# Altium PCB Main.PcbDoc (part 3 of 3)
Units mm, origin at the board's own origin, x right, y up, seen from the top; angles counter-clockwise.
Board outline 100 x 100 mm, 4 copper layers (Top Layer, Layer 2, Layer 3, Bottom Layer), stack 1.606 mm thick; 196 components, 147 nets, 684 pads, 739 vias.
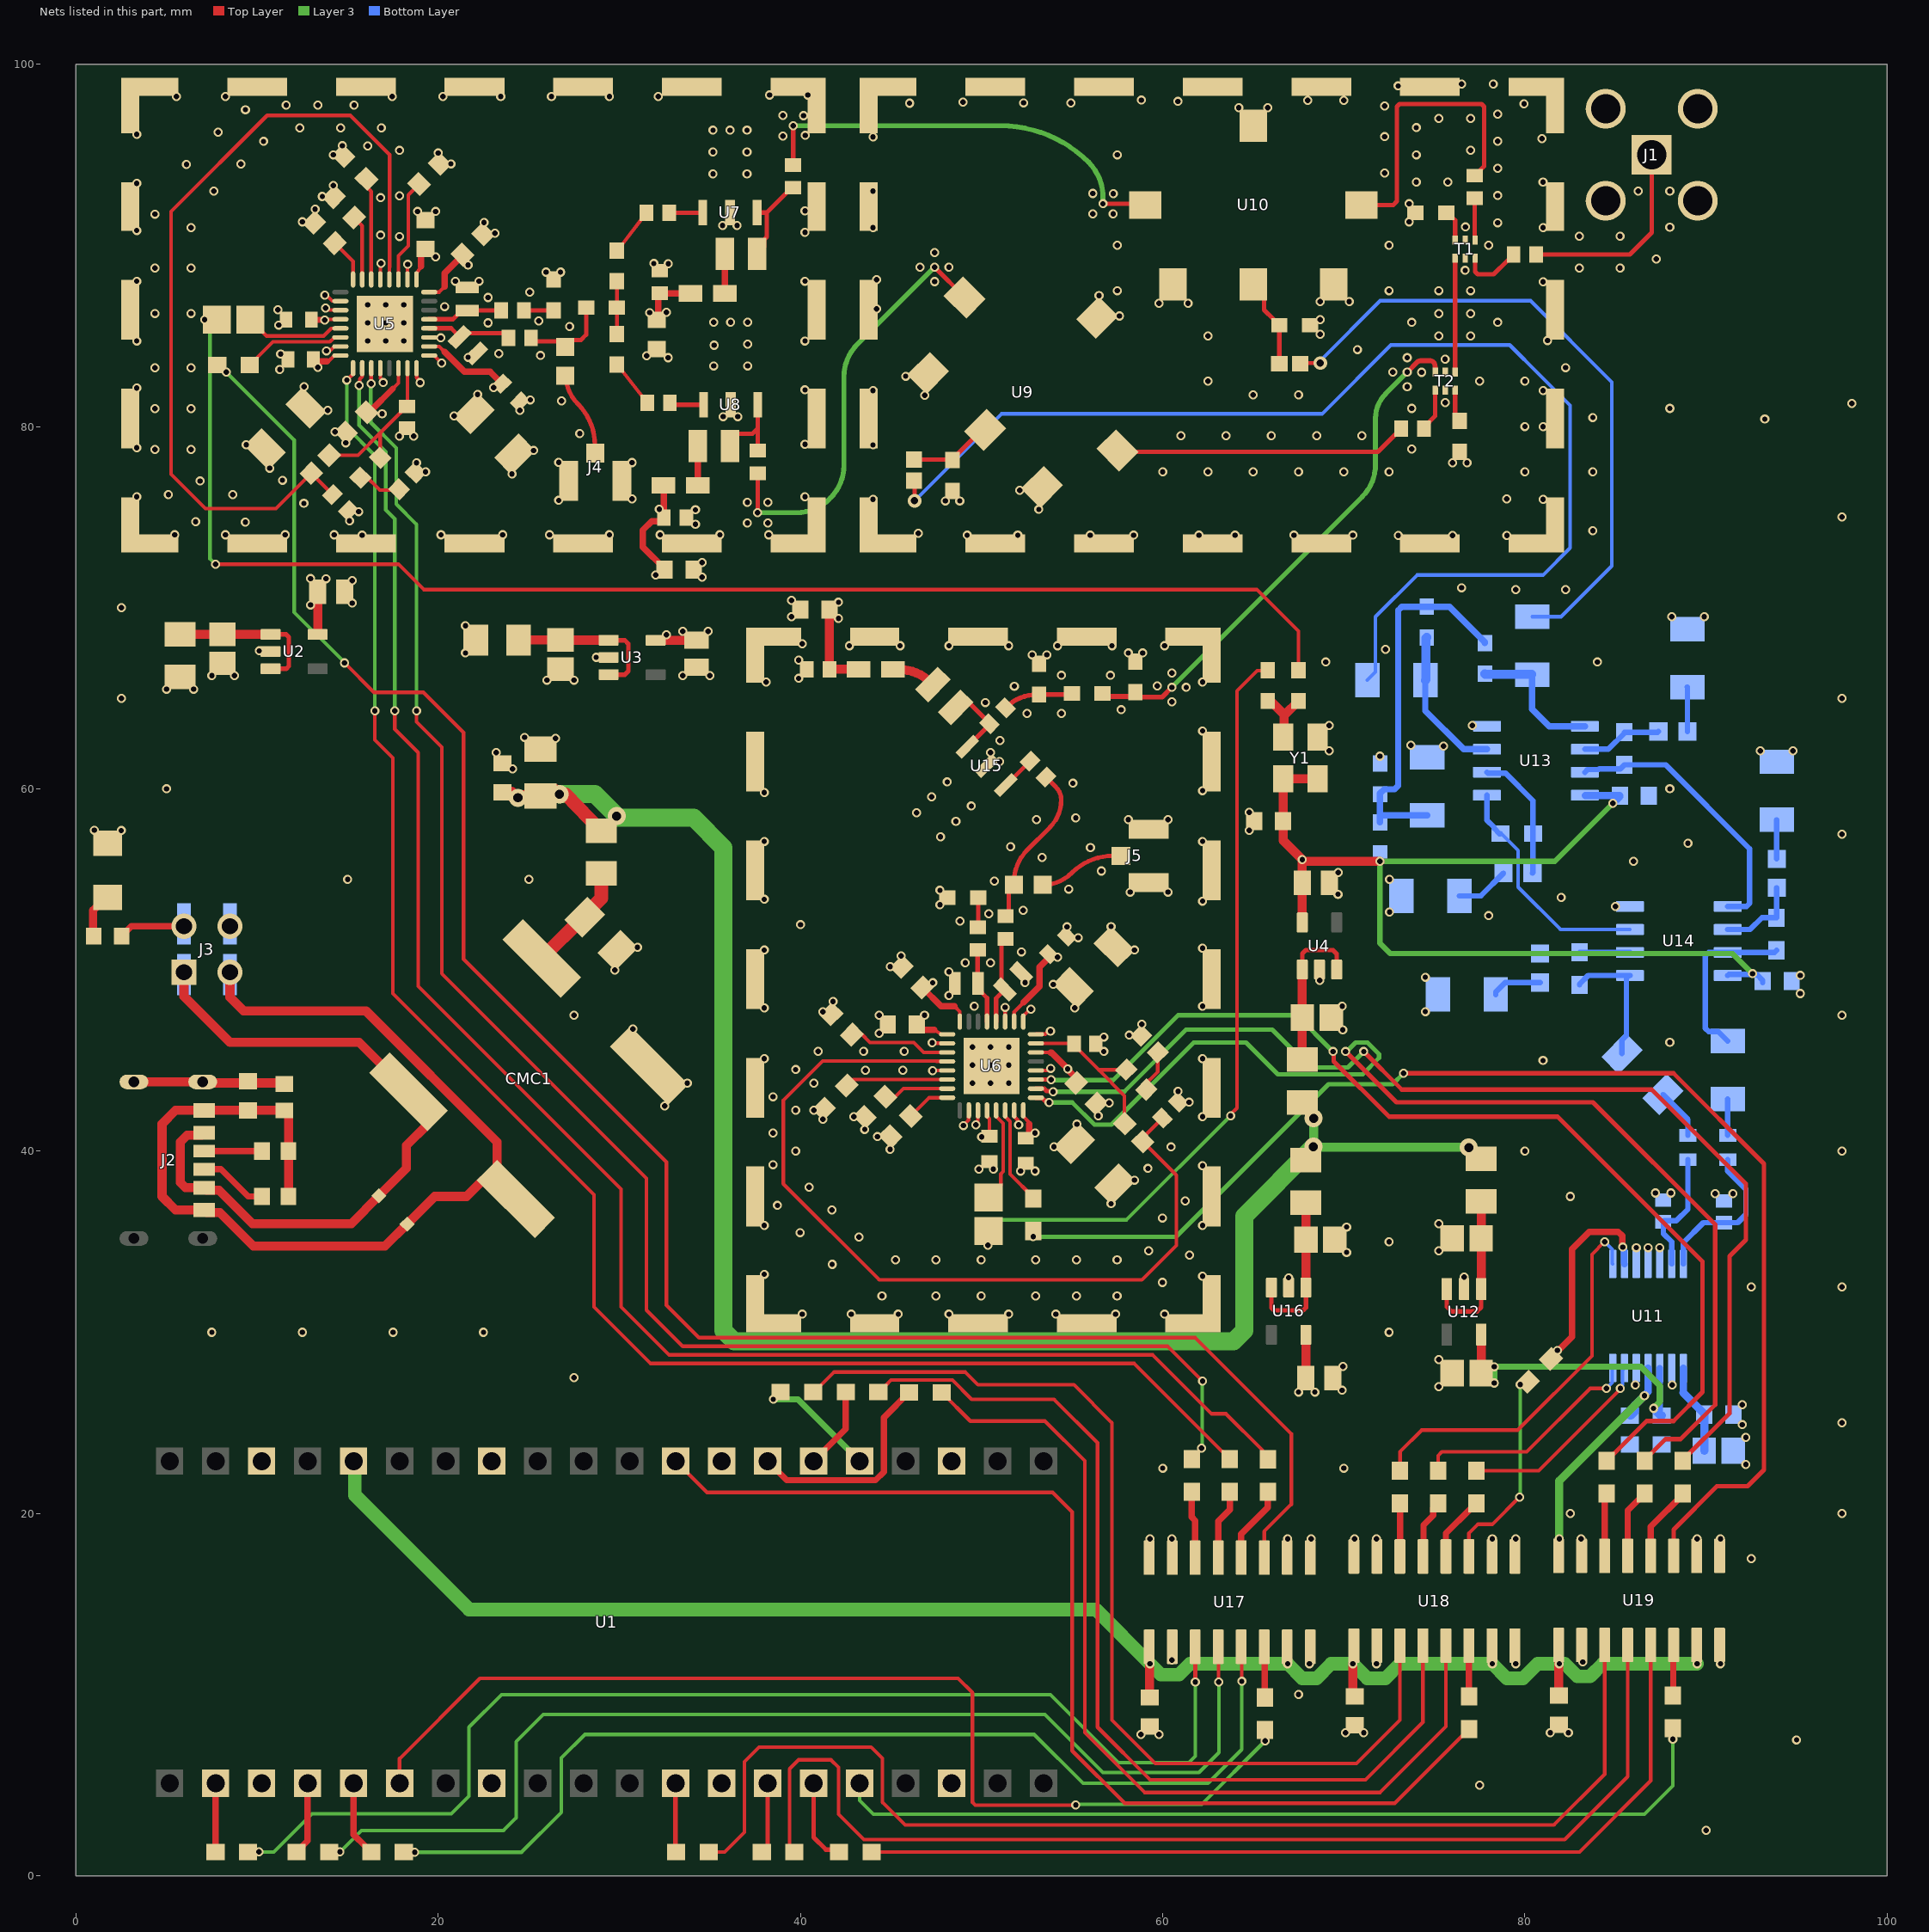
[diagram p4: the nets of this part, all layers, seen from the top]

## Part data (continued)
U13 U14: library part CMP-0272-00746-4, "IC OPAMP GP 2 CIRCUIT 8SOIC", Case/Package=D, Input Bias Current=10pA, Input Offset Voltage (Vos)=200uV, Max Operating Temperature=125°C, Max Supply Voltage=5.5V, Min Operating Temperature=-40°C, Min Supply Voltage=2.2V, Nominal Supply Current=5mA, Operating Supply Current=4.6mA, Output Current=65mA, Package Quantity=1, Power Supply Rejection Ratio (PSRR)=100dB, Voltage Gain=120dB, Bandwidth=50MHz, Common Mode Rejection Ratio=100dB, Contact Plating=Gold, Gain Bandwidth Product=50MHz, Lead Free="Lead Free", Max I/O Voltage=200uV, Number of Amplifiers=2, Number of Channels=2, Number of Circuits=2, Number of Elements=2, Number of Pins=8, Output Current per Channel=65mA, Packaging="Tape and Reel", Radiation Hardening=No, REACH SVHC="No SVHC", Slew Rate=25V/µs, Unity Gain Bandwidth Product=50MHz
U17 U18 U19: library part CMP-060-000000-1, "General Purpose Digital Isolator 2500Vrms 4 Channel 150Mbps 35kV/Âµs CMTI 16-SOIC (0.154, 3.90mm Width)", Package="SOIC-16 Silicon Labs", Check_prices=https://www.snapeda.com/parts/SI8641BB-B-IS1/Silicon+Labs/view-part/?ref=eda, Component Type=Standard, Design Item ID=SI8641BB-B-IS1, MF="Silicon Labs", MP=SI8641BB-B-IS1, Pin Count=16, SnapEDA_Link=https://www.snapeda.com/parts/SI8641BB-B-IS1/Silicon+Labs/view-part/?ref=snap, Source=SI8641BB-B-IS1.SchLib
Y1: library part CMP-041-000000-1, "TCXO Oscillators 32.000 MHZ Multi-Volt +1.7 3.6V HCMOS TCXO +/-2.5 ppm -30 +85 C 3.2x 2.5mm RoHS", Package="ECS-TXO-3225MV-0-4 ECS", Check_prices=https://www.snapeda.com/parts/ECS-TXO-3225MV-320-TR/ECS/view-part/?ref=eda, Component Type=Standard, Design Item ID=ECS-TXO-3225MV-320-TR, MF=ECS, MP=ECS-TXO-3225MV-320-TR, Pin Count=4, SnapEDA_Link=https://www.snapeda.com/parts/ECS-TXO-3225MV-320-TR/ECS/view-part/?ref=snap, Source=ECS-TXO-3225MV-320-TR.SchLib

## Free pads (board coordinates)
  rect 3.3x1 smd: 1(34.002,73.542) 1(74.756,73.542) 2(28.002,73.542) 2(68.756,73.542) 3(22.002,73.542) 3(62.756,73.542) 4(16.002,73.542) 4(56.756,73.542) 5(10.002,73.542) 5(50.756,73.542) 8(55.8,30.5) 9(49.8,30.5) 13(10.002,98.742) 13(50.756,98.742) 14(16.002,98.742) 14(56.756,98.742) 15(22.002,98.742) 15(62.756,98.742) 16(28.002,98.742) 16(68.756,98.742) 17(34.002,98.742) 17(74.756,98.742) 21(49.8,68.4) 22(55.8,68.4)
  rect 1x3.3 smd: 1(62.7,61.5) 2(62.7,55.5) 3(62.7,49.5) 4(62.7,43.5) 5(62.7,37.5) 8(3.002,80.442) 8(43.756,80.442) 9(3.002,86.442) 9(43.756,86.442) 13(37.5,37.5) 14(37.5,43.5) 15(37.5,49.5) 16(37.5,55.5) 17(37.5,61.5) 21(40.902,86.442) 21(81.656,86.442) 22(40.902,80.442) 22(81.656,80.442)
  rect 3x1 smd: 6(4.152,73.542) 6(44.906,73.542) 12(4.152,98.742) 12(44.906,98.742) 18(39.852,98.742) 18(80.606,98.742) 24(39.852,73.542) 24(80.606,73.542)
  rect 1x3 smd: 6(62.7,31.65) 12(37.5,31.65) 18(37.5,67.35) 24(62.7,67.35)
  rect 1x3.05 smd: 7(3.002,74.567) 7(43.756,74.567) 11(3.002,97.717) 11(43.756,97.717) 19(40.902,97.717) 19(81.656,97.717) 23(40.902,74.567) 23(81.656,74.567)
  rect 3.05x1 smd: 7(61.675,30.5) 11(38.525,30.5) 19(38.525,68.4) 23(61.675,68.4)
  rect 1x2.7 smd: 10(3.002,92.142) 10(43.756,92.142) 20(40.902,92.142) 20(81.656,92.142)
  rect 2.7x1 smd: 10(44.1,30.5) 20(44.1,68.4)

## Via types
v1: diameter 0.5, hole 0.3, Top Layer to Bottom Layer, 728 vias
v2: diameter 1, hole 0.5, Top Layer to Bottom Layer, 6 vias
v3: diameter 1.39, hole 0.89, Top Layer to Bottom Layer, 3 vias
v4: diameter 0.75, hole 0.4, Top Layer to Bottom Layer, 2 vias

## Nets (pads, with @x,y where several pads share a name; then routed paths per layer and width w, separated by ;. In a path a pad name is that pad's centre, name@x,y a point inside that pad or via, vN(x,y) a via of type N, cw(c..) or ccw(c..) an arc to the next point about the centre after c; other vN are vias at no path point)
3V3_Analog: C10.1 C12.2 C61.2 C62.2 R39.1 U4.5 U13.8 U14.8 Y1.1 Y1.4 | length 59.8
  Top Layer w0.5: U4.5@67.708,52.625 C10.1@67.708,54.804 v1(67.708,56.092) ; Y1.1@68.55,60.55 Y1.4@66.65,60.55 C12.2@66.65,58.221 66.65,57.15 v1(67.708,56.092) ; v1(72,56) 67.8,56 v1(67.708,56.092)
  Layer 3 w0.3: v1(84.863,59.205) 81.658,56 v1(72,56) 72,51.476 72.569,50.907 91.453,50.907 v1(92.567,49.794)
  Bottom Layer w0.3: U14.8@91.2,49.695 91.26,49.755 92.528,49.755 v1(92.567,49.794) 92.621,49.794 92.684,49.731 92.829,49.731 93.129,49.431 C62.2@93.129,49.293
  Bottom Layer w0.4: U13.8@83.334,59.62 C61.2@85.237,59.62 85.237,59.57 84.9,59.233 84.876,59.233 C61.2@84.863,59.246 ; v1(84.863,59.205) 84.872,59.205 85.087,59.421 C61.2@85.087,59.584
3V3_Digital: C51.2 C73.1 U11.4 U16.5 U17.10 U17.16 U18.10 U18.16 U19.10 U19.16 | length 15.3
  Top Layer w0.5: C73.1@67.903,27.463 U16.5@67.903,29.863
  Layer 3 w0.45: v1(81.9,18.6) 81.9,21.8 v1(86.6,26.5)
  Bottom Layer w0.4: v1(86.6,26.5) 86.6,26.527 86.795,26.722 86.795,28.025 U11.4@86.8,28.03
  Bottom Layer w0.45: C51.2@85.8,25.4 85.85,25.4 86.075,25.625 86.075,25.975 v1(86.6,26.5)
  other v1: 59.3,18.6 66.9,18.6 70.6,18.6 78.2,18.6 89.5,18.6 67.5,26.7 68.4,26.7
3V3_Pico: C79.2 C80.2 C81.2 U1.3V3 U17.1 U17.7 U18.1 U18.7 U19.1 U19.7 | length 89.4
  Top Layer w0.5: U17.1@59.269,11.7 59.269,9.855 C79.2@59.283,9.841 ; v1(70.5,11.7) 70.5,10.004 C80.2@70.599,9.905 ; U19.1@81.863,12.736 81.871,12.728 81.871,9.946 C81.2@81.88,9.937
  Layer 3 w0.75: U1.3V3@15.327,22.89 15.389,22.826 15.389,21.011 21.7,14.7 56.3,14.7 v1(59.3,11.7) 59.9,11.1 60.9,11.1 61.5,11.7 v1(66.9,11.7) 67.7,10.9 68.5,10.9 69.3,11.7 v1(70.5,11.7) 71.3,10.9 72.3,10.9 73.1,11.7 v1(78.2,11.7) 79,10.9 79.9,10.9 80.7,11.7 82.2,11.7 82.9,11 83.6,11 84.3,11.7 v1(89.5,11.7)
  other v1: 81.9,11.7
3V3_Synth_1: C2.1 C22.1 C23.2 C24.2 C25.2 C26.1 C27.1 C75.2 C76.1 L1.2 L2.2 U2.5 U5.4 U5.6 U5.10 U5.16 U5.17 U5.26 U5.28 U5.32 | length 20.7
  Top Layer w0.2: v1(13.734,85.871) 13.773,85.91 14.589,85.91 U5.28@14.601,85.922 ; v1(13.742,87.257) 13.824,87.257 14.149,86.932 14.25,86.932 14.259,86.922 U5.26@14.601,86.922 ; 13.85,83.601 13.941,83.601 14.262,83.922 U5.32@14.601,83.922 ; U5.4@16.801,83.222 16.81,83.214 16.81,82.659 16.962,82.506 v1(16.962,82.425) ; 17.494,82.094 17.8,82.4 U5.6@17.8,83.22 ; U5.17@18.801,88.122 18.801,88.461 19.051,88.83 ; U5.10@19.501,84.422 20.051,84.422 20.351,84.122 ; U5.16@19.501,87.422 20.051,87.422 20.351,87.722
  Top Layer w0.35: C26.1@13.072,83.784 13.072,83.776 13.247,83.601 13.85,83.601 ; C76.1@13.172,85.901 13.172,85.889 13.175,85.886 13.719,85.886 v1(13.734,85.871) ; C23.2@16.114,81.004 16.204,80.913 16.313,80.913 17.494,82.094 ; 19.051,88.83 19.051,89.526 19.326,89.801 C75.2@19.353,89.801 ; 20.351,84.122 21.446,83.027 22.86,83.027 C27.1@23.626,82.262 ; 20.351,87.722 20.351,88.46 C24.2@21.382,89.492
  Top Layer w0.5: U2.5@13.343,68.524 C2.1@13.343,70.878
  other v1: 12.943,70.153 12.943,71.603 13.8,71.6 20.871,80.577 16.9,80.7 13.9,80.9 22.171,81.777 23.06,82.156 12.6,82.2 13.351,83.272 21.651,83.822 20.951,88.022 22.251,88.022 21.646,88.919 19.851,89.372
3V3_Synth_2: C8.1 C34.1 C35.2 C36.2 C37.2 C38.1 C39.1 C77.2 C78.1 L3.2 L4.2 U3.5 U6.4 U6.6 U6.10 U6.16 U6.17 U6.26 U6.28 U6.32 | length 20.3
  Top Layer w0.2: 47.392,46.7 47.761,46.45 U6.17@48.1,46.45 ; 48.5,48 48.8,47.7 U6.16@48.8,47.15 ; v1(48.994,41.412) 48.994,41.432 49.287,41.725 49.287,41.877 49.29,41.88 49.29,42.24 U6.26@49.3,42.25 ; U6.28@50.3,42.25 50.3,41.911 50.43,41.782 C78.1@50.43,40.821 ; U6.10@51.8,47.15 51.8,47.681 52.32,48.2 ; U6.32@52.3,42.25 52.3,41.911 52.621,41.59 52.621,41.499 ; U6.4@53,44.45 53.01,44.46 53.626,44.46 53.737,44.57 v1(53.818,44.57) ; U6.6@53,45.45 53.006,45.444 53.797,45.444 53.803,45.438
  Top Layer w0.35: C77.2@46.421,47.002 46.421,46.975 46.696,46.7 47.392,46.7 ; C36.2@46.731,49.031 47.762,48 48.5,48 ; 52.32,48.22 53.195,49.095 53.195,50.153 53.742,50.7 v1(54.2,50.7) ; C38.1@52.439,40.721 52.446,40.721 52.621,40.896 52.621,41.499 ; 53.803,45.438 53.856,45.438 v1(54.756,44.537) 54.756,44.497 55.219,44.035 C35.2@55.219,43.763
  Top Layer w0.5: U3.5@32.004,68.203 32.6,68.203 33.5,68.203 C8.1@34.25,68.203
  other v1: 53.997,40.247 50.004,40.78 52.95,41 55.268,41.486 46.85,47.5 55.15,47.9 48.2,48.6 53.95,49.2 47.303,49.295 52.4,49.3 48.2,49.9 32.6,68.5 33.5,68.7 34.9,68.7
4V5: C58.2 C59.2 U11.3 U12.5 | length 17.3
  Top Layer w0.5: C58.2@77.584,27.745 U12.5@77.584,29.879
  Layer 3 w0.35: v1(78.3,27.2) v1(78.3,28.1) 86.4,28.1 87.441,27.059 87.441,26.155 v1@87.1,25.814
  Layer 3 w0.45: v1(87.1,25.8) v1@87.1,25.814
  Bottom Layer w0.35: C59.2@87.45,25.504 U11.3@87.45,28.03
  Bottom Layer w0.4: C59.2@87.45,25.504 C59.2@87.554,25.4
  Bottom Layer w0.45: v1(87.1,25.8) 87.104,25.8 87.504,25.4 C59.2@87.554,25.4
5V_CLN: C1.2 C6.2 C40.2 C41.2 C43.2 C44.2 C55.2 C56.2 FB1.2 FB2.1 FB3.1 FB4.1 FB5.1 FB8.1 J3.2 R20.2 R24.2 R36.2 R38.2 | length 112.5
  Top Layer w0.35: R36.2@2.527,51.865 2.527,51.892 3.05,52.415 v3(5.96,52.415) ; C41.2@32.071,85.878 32.146,85.953 32.146,87.28 C40.2@32.221,87.355 R20.2@33.925,87.355 ; R24.2@32.438,76.752 32.456,76.735 C43.2@32.456,74.963 32.26,74.767 31.785,74.767 31.3,74.282 31.3,73.35 32.5,72.15 C44.2@32.5,72.1
  Top Layer w0.5: C56.2@41.6,69.9 C55.2@41.6,66.6 43.197,66.6 R38.2@43.204,66.593
  Top Layer w0.75: C1.2@23.542,59.808 23.617,59.733 24.036,59.733 24.221,59.548 24.352,59.548 v2(24.4,59.5) 24.448,59.548 25.598,59.548 C6.2@25.646,59.596 25.806,59.817 26.407,59.913 v2(26.7,59.7) 27.037,59.695 FB1.2@29,57.676
  Layer 3 w0.5: v2(68.326,40.243) 68.347,40.221 76.879,40.221 v2(76.9,40.2) ; v2@68.328,40.245 68.328,41.811 v2(68.33,41.813)
  Layer 3 w0.75: v2@29.935,58.419 29.969,58.453 30.078,58.453 v2@30.131,58.4
  Layer 3 w1: v2(26.7,59.7) 28.638,59.716 v2@29.954,58.4 ; v2@30.131,58.4 34.1,58.4 35.75,56.75 35.75,30.086 36.336,29.5 63.914,29.5 64.5,30.086 64.5,36.417 v2(68.326,40.243)
  other v1: 5,65.5 6.5,65.5 21.5,67.5 21.5,69 42.1,69.4 42.1,70.3 32,71.8 32.206,75.438 31.667,86.289 32.6,86.3
  other v2: 29.854,58.501
5V_USB: CMC1.3 D2.2 J2.A9 J2.B9 J3.1 | length 39.5
  Top Layer w0.5: J3.1@5.96,49.875 5.96,48.54 8.5,46 15.639,46 19.4,42.239 19.4,41.461 18.25,40.312 18.25,39.056 D2.2@16.722,37.528 15.194,36 9.75,36 7.9,37.85 7.21,37.85 J2.A9@7.08,37.98 7.076,37.984 6.043,37.984 5.75,38.276 5.75,40.5 6.14,40.89 6.95,40.89 J2.B9@7.08,41.02
BCK: R59.1 U11.8 | length 21.8
  Top Layer w0.2: R59.1@73.104,22.364 73.104,23.404 74.3,24.6 79.6,24.6 83.7,28.7 83.7,34.3 v1(84.4,35)
  Bottom Layer w0.2: v1(84.4,35) 84.82,34.58 84.82,33.8 U11.8@84.85,33.77
BCK_P: R61.2 U1.GP19 | length 6.2
  Layer 3 w0.35: v1(38.5,26.3) 39.857,26.3 U1.GP19@43.267,22.89
CLK_1: R32.1 U5.1 | length 96.2
  Top Layer w0.2: v1(14.952,82.565) 14.961,82.565 15.301,82.905 U5.1@15.301,83.222 ; v1(16.5,64.3) 16.5,62.7 17.5,61.7 17.5,48.7 28.6,37.6 28.6,31.4 31.725,28.275 58.43,28.275 63.304,23.401 63.354,23.401 63.704,23.051 R32.1@63.704,23.001
  Layer 3 w0.2: v1(14.952,82.565) 14.952,79.948 16.5,78.4 v1(16.5,64.3)
CLK_1_P: R55.2 U1.GP2 | length 4.1
  Top Layer w0.35: R55.2@12.173,1.315 12.223,1.315 12.498,1.59 12.498,1.64 12.785,1.927 U1.GP2@12.787,5.11
CLK_2: R68.1 U6.1 | length 64.6
  Top Layer w0.246: U6.1@53,42.95 53.326,42.95 53.538,42.738 53.681,42.738 v1(53.729,42.689) ; v1(70.1,45.5) 72.9,42.7 83.75,42.7 90.5,35.95 90.5,26.003 88.597,24.1 87.766,24.1 86.612,22.946 R68.1@86.612,22.896
  Layer 3 w0.246: v1(53.729,42.689) 55,42.689 56.233,41.456 57.171,41.456 61.715,46 64.603,46 66.359,44.244 71.044,44.244 71.95,45.15 71.95,45.354 71.306,45.998 70.651,45.998 70.153,45.5 v1(70.1,45.5)
CLK_2_P: R71.2 U1.GP10 | length 3.9
  Top Layer w0.254: R71.2@37.869,1.315 38.185,1.632 U1.GP10@38.187,5.11
CPOUT_1: C16.1 R11.2 R28.1 U5.7 | length 9
  Top Layer w0.2: R28.1@13.984,78.413 14,78.429 14.503,78.429 14.52,78.413 15.565,78.413 16.796,79.645 ; R11.2@16.796,78.277 16.796,78.743 16.778,78.762 16.796,78.78 16.796,79.645 ; C16.1@18.28,81.108 18.3,81.128 U5.7@18.3,83.22 ; C16.1@18.301,81.149 18.246,81.149 17.93,80.833 17.93,80.778 16.796,79.645
CPOUT_2: C32.1 R18.2 R29.1 U6.7 | length 9.2
  Top Layer w0.2: U6.7@53,45.95 55.073,45.95 C32.1@55.104,45.919 55.104,45.844 56.455,44.493 ; R29.1@57.907,41.515 57.891,41.531 57.891,43.057 56.455,44.493 ; R18.2@57.992,44.493 57.527,44.493 57.508,44.474 57.489,44.493 56.455,44.493
DATA_1: R54.1 U5.2 | length 96.6
  Top Layer w0.2: v1(15.629,82.274) 15.66,82.304 15.66,82.627 15.8,82.767 U5.2@15.8,83.22 ; v1(17.6,64.3) 17.6,63.3 18.9,62 18.9,49.1 30.1,37.9 30.1,31.4 32.75,28.75 59.45,28.75 62.7,25.5 63.5,25.5 65.5,23.5
  Layer 3 w0.2: v1(15.629,82.274) 15.629,80.077 17.1,78.607 17.1,75.4 17.6,74.9 v1(17.6,64.3)
DATA_1_P: R57.2 U1.GP3 | length 4.2
  Top Layer w0.35: U1.GP3@15.327,5.11 15.325,2.275 15.975,1.625 15.975,1.575 16.25,1.3 R57.2@16.3,1.3
DATA_2: R70.1 U6.2 | length 61.7
  Top Layer w0.246: U6.2@53,43.45 53.455,43.449 53.596,43.309 53.918,43.309 v1(53.949,43.279) ; v1(71.1,45.5) 73.2,43.4 87,43.4 92.2,38.2 92.2,35.1 91.3,34.2 91.3,25.53 88.716,22.946 R70.1@88.716,22.896
  Layer 3 w0.246: v1(53.949,43.279) 57.871,43.279 61.292,46.7 66.056,46.7 68.141,44.615 69.493,44.615 70.219,44.615 71.1,45.496 v1(71.1,45.5)
DATA_2_P: R73.2 U1.GP11 | length 4.7
  Top Layer w0.254: U1.GP11@40.727,5.11 40.725,2.124 41.402,1.447 42.002,1.447 R73.2@42.134,1.315
DOUT: R10.1 U18.11 | length 11.1
  Top Layer w0.2: U18.11@76.909,17.624 76.909,18.909 77.4,19.4 78.2,19.4 v1(79.7,20.9)
  Layer 3 w0.2: v1(79.7,20.9) ccw(c79.389,21.061) 79.739,21.06 v1(79.739,27.122)
DOUT_P: R66.2 U1.GP22 | length 61.1
  Top Layer w0.2: U1.GP22@33.107,22.89 34.836,21.159 53.923,21.159 55,20.083 55,6.9 57.9,4 72.814,4 76.519,7.705 76.569,7.705 76.919,8.055 R66.2@76.919,8.105
Forward_Signal: C48.2 T2.4 | length 2.4
  Top Layer w0.246: C48.2@74.425,79.881 74.425,79.956 75.05,80.582 T2.4@75.05,82
FWD_IF: C50.1 FB6.1 | length 66.2
  Top Layer w0.246: FB6.1@46.267,77.022 46.3,76.989 v4(46.3,75.9)
  Bottom Layer w0.2: v4(46.3,75.9) 51.1,80.7 68.8,80.7 72.6,84.5 79.161,84.5 80.83,82.83 82.5,81.161 82.5,73.3 81,71.8 74.05,71.8 71.75,69.5 71.75,66.45 C50.1@71.3,66
GND: C1.1 C2.2 C3.1 C5.1 C6.1 C8.2 C9.1 C10.2 C11.1 C12.1 C13.2 C16.2 C17.1 C18.2 C21.2 C22.2 C23.1 C24.1 C25.1 C26.2 C27.2 C29.2 C30.2 C31.2 C32.2 C33.1 C34.2 C35.1 C36.1 C37.1 C38.2 C39.2 C40.1 C41.1 C43.1 C44.1 C46.1 C47.1 C51.1 C52.1 C53.1 C55.1 C56.1 C57.1 C58.1 C59.1 C60.1 C61.1 C62.1 C63.1 C64.1 C65.1 C66.1 C68.2 C70.2 C73.2 C74.1 C75.1 C76.2 C77.1 C78.2 CMC1.2 DS1.1 J1.2 J1.3 J1.4 J1.5 J3.4 J4.2 J4.3 J5.2 J5.3 pad.1 pad.2 pad.3 pad.4 pad.5 pad.6 pad.7 pad.8 pad.9 pad.10 pad.11 pad.12 pad.13 pad.14 pad.15 pad.16 pad.17 pad.18 pad.19 pad.20 pad.21 pad.22 pad.23 pad.24 R5.1 R7.1 R12.1 R14.1 R26.1 R27.1 R30.1 R31.1 R34.2 R35.1 R37.1 T1.2 T1.5 T2.2 T2.5 U2.2 U3.2 U4.2 U5.8 U5.9 U5.11 U5.18 U5.21 U5.27 U5.31 U5.33 U6.8 U6.9 U6.11 U6.18 U6.21 U6.27 U6.31 U6.33 U7.2 U8.2 U9.4 U9.5 U9.6 U10.4 U10.5 U10.6 U11.2 U11.5 U11.10 U11.11 U11.12 U12.2 U13.4 U14.4 U15.2 U16.2 U17.9 U17.15 U18.9 U18.15 U19.9 U19.15 Y1.2 | length 11.8
  Top Layer w0.2: v1(13.776,86.539) 13.857,86.539 13.966,86.43 14.594,86.43 U5.27@14.601,86.422 ; v1(13.824,84.178) 13.881,84.235 14.075,84.235 14.262,84.422 U5.31@14.601,84.422 ; U5.21@16.801,88.122 16.81,88.131 16.81,88.976 v1(16.84,89.006) ; U5.18@18.301,88.122 18.305,88.127 18.305,88.946 v1(18.31,88.951) ; U5.8@18.801,83.222 18.81,83.213 18.81,82.702 18.81,82.697 19.003,82.504 v1(19.003,82.423) ; U5.9@19.5,83.92 19.811,83.92 19.835,83.897 19.835,83.849 v1(20.181,83.503) ; U5.11@19.501,84.922 19.513,84.91 20.121,84.91 v1(20.137,84.894) ; v1(47.274,45.986) 47.3,45.96 48.09,45.96 U6.18@48.1,45.95 ; v1(47.299,44.447) v1(47.299,44.447) 48.098,44.448 U6.21@48.1,44.45 ; v1(49.69,41.456) 49.69,41.537 49.79,41.638 49.79,42.24 U6.27@49.8,42.25 ; U6.11@51.3,47.15 v1(51.3,47.938) ; U6.31@51.8,42.25 51.8,41.911 51.99,41.722 51.99,41.513 v1(52.047,41.455) ; U6.9@52.3,47.15 52.3,47.461 52.669,47.83 v1(52.72,47.83) ; U6.8@53,46.45 53.01,46.46 53.521,46.46 53.623,46.562 53.745,46.562 v1(53.803,46.62)
  other v1: 92.5,17.5 60.5,18.6 68.2,18.6 71.8,18.6 79.5,18.6 83.1,18.6 90.8,18.6 82.5,20 97.5,20 60,22.5 70,22.5 92.2,22.7 92.2,24.2 92,24.9 97.5,25 92,26 69.9,26.8 75.25,27 86.1,27.1 88.125,27.1 69.953,28.113 75.25,28.5 72.5,30 40.1,31 42.8,31 45.4,31 48.2,31 51.5,31 54.1,31 57.4,31 60.1,31 44.5,32 47.481,32.003 49.981,32.003 52.981,32.003 55.231,32.003 57.481,32.003 92.5,32.5 97.5,32.5 59.981,32.753 66.953,33.013 76.65,33.05 62.2,33.1 38,33.2 41.75,33.75 45.25,34 47.481,34.003 49.981,34.003 52.981,34.003 55.231,34.003 57.481,34.003 61.481,34.253 70.153,34.413 59.231,34.503 75.25,34.5 86.149,34.674 86.799,34.674 87.449,34.674 72.5,35 43.231,35.253 39.981,35.503 70.153,35.813 38,35.9 62.202,35.898 75.25,36 59.983,36.31 41.731,36.753 38.731,37.003 57.15,37.1 61.248,37.252 82.5,37.5 90.498,37.653 91.488,37.653 87.208,37.69 88.056,37.69 40.481,38.003 58.45,38.4 52.15,38.9 52.95,38.9 49.85,39 50.65,39 59.187,39.045 62.2,39.2 38.481,39.253 39.731,40.003 80,40 97.5,40 44.95,40.1 60.464,40.23 44.25,40.8 38.481,41.003 43.55,41.2 41.231,41.753 42.95,41.9 62.2,41.9 56.439,41.954 39.731,42.253 40.731,42.253 32.5,42.5 57.039,42.654 61.45,42.7 38.481,43.003 60.85,43.3 33.75,43.75 49.5,43.75 50.5,43.75 51.5,43.75 40.731,43.753 43.592,44.465 45.655,44.465 39.731,44.503 49.5,44.75 50.5,44.75 51.5,44.75 81,45 38,45.1 62.2,45.1 40.981,45.503 43.481,45.503 45.731,45.503 56.75,45.5 49.5,45.75 50.5,45.75 51.5,45.75 88,46 56.75,46.3 58.15,46.4 44.35,46.5 69.941,46.697 30.75,46.75 58.85,47 27.5,47.5 44.35,47.5 97.5,47.5 41.232,47.691 74.5,47.7 38,47.9 49.6,48 62.2,47.996 69.914,48.007 41.798,48.257 95.2,48.7 68.665,49.418 74.5,49.6 95.2,49.7 29.75,50 44.954,50.177 49.1,50.4 50.5,50.4 45.554,50.777 52.2,51 38,51.1 58.45,51.1 62.2,51.2 31,51.25 55.339,51.785 54.716,52.381 57.15,52.4 40,52.5 48.8,52.7 78,53 50.4,53.1 72.525,53.2 52.3,53.3 85,53.5 47.7,53.6 62.2,53.8 38,53.9 82,54 69.68,54.181 58.2,54.3 60.3,54.3 47.7,54.4 54.81,54.465 50.7,54.9 15,55 25,55 72.525,55 69.696,55.375 56.61,55.465 86,56 53.338,56.208 56.01,56.765 51.6,56.8 89,57 38,57.1 62.2,57.1 47.732,57.35 97.5,57.5 1.016,57.718 2.496,57.698 64.775,57.7 48.583,58.201 58.1,58.3 60.3,58.3 53.038,58.308 55.2,58.4 46.403,58.678 64.775,58.7 49.434,59.052 47.244,59.564 38,59.8 62.2,59.9 5,60 88,60 55.038,60.308 48.105,60.38 24.1,61.1 51,61.5 72,61.8 23.2,62 50.5,62 69.2,62.1 93,62.1 94.8,62.1 75.512,62.354 73.7,62.4 51.01,62.665 26.48,62.791 24.763,62.841 62.2,63.2 69.2,63.5 77.1,63.5 52.51,64.165 54.41,64.165 57.71,64.365 50.21,64.765 60.5,64.8 2.5,65 97.5,65 61.3,65.6 51.81,65.665 59.7,65.678 38.1,65.9 62.2,65.9 26,66 27.5,66 39.9,66.1 7.5,66.25 8.75,66.25 33.5,66.25 35,66.25 54.41,66.265 57.11,66.265 60.5,66.4 69,67 84,67 39.9,67.1 28.72,67.258 52.8,67.4 53.6,67.4 58.1,67.5 58.9,67.5 10.117,67.619 72.3,67.7 42.7,67.9 45.5,67.9 48.2,67.9 51.5,67.9 54.2,67.9 57.2,67.9 60.1,67.9 40.1,68 39.5,69.5 88.1,69.5 89.9,69.5 2.5,70 15.25,70.25 39.5,70.4 79.5,71 82.25,71 76.5,71.1 15.25,71.5 34.567,71.689 34.567,72.489 15.8,74 49.2,74 52,74 56,74 58.4,74 62,74 64,74 67.25,74 70.5,74 73.003,73.985 76.003,73.985 79.003,73.985 5.451,74.022 8.251,74.022 11.551,74.022 14.251,74.022 20.151,74.022 23.551,74.022 26.151,74.022 29.451,74.022 32.251,74.022 35.551,74.022 38.251,74.022 46.5,74.1 83.75,74.25 34.2,74.6 37.069,74.682 38.2,74.682 9.351,74.722 6.604,74.741 15.1,74.8 97.5,75 15.6,75.3 34.2,75.4 53.161,75.424 12.581,75.759 37.069,75.814 38.205,75.809 47.996,75.896 48.796,75.896 26.651,75.922 30.708,76.009 44.003,75.985 79,76 81.003,75.985 3.351,76.122 40.251,76.122 5.104,76.241 8.66,76.239 52.1,76.485 6.854,76.991 11.396,77.035 24.071,77.377 19.3,77.5 60,77.5 62.5,77.5 65,77.5 67.5,77.5 70,77.5 72.5,77.5 80,77.5 83.75,77.5 10.7,77.7 18.8,78 30.708,78.009 76,78 76.8,78 26.651,78.022 25.271,78.677 4.354,78.741 6.354,78.741 73.75,78.75 3.351,78.822 9.4,79 44.003,78.985 40.251,79.022 14.9,79.1 17.851,79.472 18.651,79.472 61,79.5 63.5,79.5 66,79.5 68.5,79.5 71,79.5 27.816,79.612 14.3,79.7 81.003,79.985 80,80 93.245,80.41 83.75,80.5 35.735,80.548 36.535,80.548 24.5,80.9 4.354,80.991 6.354,80.991 73.75,81 88,81 98.056,81.269 75.596,81.324 26.816,81.412 25.086,81.472 46.867,81.717 65,81.75 67.5,81.75 44.003,81.985 81.003,81.985 40.251,82.022 3.351,82.122 73.5,82.2 62.5,82.5 77.5,82.5 80,82.5 45.807,82.778 74.3,82.993 72.7,83 11.25,83.15 4.354,83.241 6.354,83.241 82.25,83.25 35.205,83.347 37.084,83.347 75.592,83.712 32.7,83.8 73.5,83.8 31.5,83.9 25.651,83.922 11.3,84 23.351,84.022 70.75,84.25 35.23,84.488 37.084,84.551 3.351,84.722 16.101,84.722 17.101,84.722 18.101,84.722 40.251,84.722 81.25,84.75 62.5,85 75.25,85 77,85 68.7,85.1 27.251,85.522 11.2,85.6 16.101,85.722 17.101,85.722 18.101,85.722 22.751,85.722 35.205,85.754 36.144,85.754 37.084,85.754 73.75,85.75 78.5,85.75 25.551,85.834 68.7,85.9 57.615,86.101 4.354,86.241 6.354,86.241 75.25,86.225 77,86.225 11.15,86.45 44.2,86.5 20.351,86.622 16.101,86.722 17.101,86.722 18.101,86.722 59.8,86.8 61.4,86.8 68.7,86.9 70.3,86.9 22.751,87.122 56.484,87.233 25.051,87.422 57.5,87.5 72.5,87.5 75.25,87.5 77,87.5 81.003,87.985 3.351,88.022 40.251,88.022 47.4,88 44.2,88.1 25.951,88.522 26.751,88.522 76.702,88.621 4.354,88.741 6.354,88.741 83,88.75 85.25,88.75 46.6,88.8 48.2,88.8 32.703,88.984 31.9,89 87.25,89.25 47.407,89.6 57.5,90 72.5,90 78,90 17.854,90.491 83,90.5 85.25,90.5 16.816,90.567 23.128,90.669 40.251,90.722 3.351,90.822 6.351,90.972 44.003,90.985 81.003,90.985 76.71,91.015 88,91 35.7,91.1 36.5,91.1 22.528,91.269 78.5,91.25 12.5,91.3 73.6,91.3 4.351,91.722 56.134,91.734 57.266,91.734 18.851,91.872 19.851,91.872 40.251,91.9 13.2,92 73.6,92.3 16.816,92.63 13.6,92.7 17.854,92.741 78.5,92.75 56.134,92.866 57.271,92.861 7.604,92.991 44,93 86.25,93 88,93 14.2,93.3 3.351,93.422 74,93.5 75.75,93.5 81,93.5 35.17,93.951 37.049,93.951 72.25,94 78.5,94.25 6.101,94.472 9.104,94.491 20.7,94.5 14.2,95 57.5,95 74,95 20,95.1 35.17,95.154 37.049,95.154 17.854,95.241 77,95.25 16.104,95.491 14.7,95.5 10.354,95.741 78.5,95.75 80.945,95.898 44.003,95.985 72.25,96 39.034,96.034 40.259,96.073 3.351,96.122 7.854,96.241 35.17,96.358 36.11,96.358 37.049,96.358 12.354,96.491 14.604,96.491 16.854,96.491 74,96.5 75.25,97 77,97 39.034,97.166 40.171,97.161 78.5,97.25 9.354,97.491 64.2,97.6 65.8,97.6 72.25,97.7 11.604,97.741 13.354,97.741 15.354,97.741 79.954,97.818 46.022,97.85 52.315,97.87 54.933,97.866 48.974,97.915 60.839,97.945 68,98 70,98 58.815,98.017 5.551,98.222 8.251,98.222 17.451,98.222 20.251,98.222 23.451,98.222 26.251,98.222 29.451,98.222 32.151,98.222 38.3,98.3 40.4,98.3 73,98.8 76.5,98.9 78.25,98.9
  other v3: 8.5,52.415
LE_1: R19.1 U5.3 | length 94.4
  Top Layer w0.2: v1(16.289,82.362) 16.294,82.367 16.294,83.216 U5.3@16.3,83.22 ; v1(18.8,64.3) 18.8,63.7 20.2,62.3 20.2,49.8 31.5,38.5 31.5,31.225 33.5,29.225 60.275,29.225 v1(62.2,27.3)
  Layer 3 w0.2: v1(16.289,82.362) 16.271,82.344 16.271,80.229 17.681,78.819 17.681,75.719 18.8,74.6 v1(18.8,64.3) ; v1(62.15,23.6) 62.175,23.625 62.175,27.275 v1(62.2,27.3)
LE_1_P: R33.2 U1.GP1 | length 3.8
  Top Layer w0.35: R33.2@7.705,1.315 U1.GP1@7.707,5.11
LE_2: R67.1 U6.3 | length 58.3
  Top Layer w0.246: U6.3@53,43.95 53.842,43.949 v1(53.845,43.946) ; v1(69.4,45.5) 69.449,45.451 69.449,44.951 72.5,41.9 81.8,41.9 89.8,33.9 89.8,26.7 88.2,25.1 86.712,25.1 84.885,23.273 84.835,23.273 84.508,22.946 R67.1@84.508,22.896
  Layer 3 w0.246: v1(53.845,43.946) 53.871,43.921 57.275,43.921 60.852,47.498 67.402,47.498 v1(69.4,45.5)
LE_2_P: R69.2 U1.GP9 | length 3.8
  Top Layer w0.254: U1.GP9@33.107,5.11 33.105,1.35 R69.2@33.141,1.315
LO_1: C45.2 U9.2 | length 23.7
  Top Layer w0.246: v1(37.635,75.248) C45.2@37.635,77.423 ; v1(47.4,88.8) U9.2@49.068,87.132
  Layer 3 w0.246: 41.592,75.992 41.656,76.056
  Layer 3 w0.276: v1(37.635,75.248) 39.796,75.248 ccw(c39.796,77.788) 41.592,75.992 ; 41.656,76.056 ccw(c39.86,77.852) 42.4,77.852 42.4,82.748 cw(c44.94,82.748) 43.144,84.544 v1(47.4,88.8)
LO_2: C42.2 U10.2 | length 23.9
  Top Layer w0.246: C42.2@39.592,94.434 39.6,94.441 v1(39.6,96.6) ; v1(56.7,92.3) 58.963,92.3 U10.2@59.037,92.226
  Layer 3 w0.276: v1(39.6,96.6) 51.057,96.6 51.059,96.6 cw(c51.06,89.746) 55.907,94.591 cw(c53.985,92.672) v1@56.677,92.303
LO_OUT: C14.2 R22.1 R52.2 | length 4.9
  Top Layer w0.246: C14.2@25.32,84.899 25.32,84.757 25.377,84.7 26.789,84.7 R52.2@27.049,84.44 ; R52.2@27,84.4 27.377,84.777 27.877,84.777 28.165,85.065 R22.1@28.165,86.563
LRCK: R60.1 U11.7 | length 12.9
  Top Layer w0.2: R60.1@75.208,22.364 75.208,23.195 75.413,23.4 80.1,23.4 83.6,26.9 v1(84.5,26.9)
  Bottom Layer w0.2: v1(84.5,26.9) 84.82,27.22 84.82,28 U11.7@84.85,28.03
LRCK_P: R63.2 U1.GP20 | length 4.5
  Top Layer w0.35: U1.GP20@40.727,22.89 42.5,24.663 R63.2@42.5,26.7
MUX_1: R6.1 U17.11 | length 108.1
  Top Layer w0.2: v1(14.831,66.951) 16.456,65.325 19.175,65.325 21.4,63.1 21.4,50.6 32.6,39.4 32.6,31.5 34.4,29.7 61.8,29.7 67.1,24.4 67.1,20.5 65.605,19.005 U17.11@65.605,17.56
  Layer 3 w0.2: v1(8.3,83) 12.043,79.257 12.043,69.757 14.831,66.969 v1(14.831,66.951)
MUX_1_P: R58.2 U1.GP4 | length 58.9
  Top Layer w0.2: U1.GP4@17.867,5.11 17.865,6.465 22.3,10.9 48.7,10.9 49.5,10.1 49.5,4.049 49.649,3.9 v1(55.2,3.9)
  Layer 3 w0.2: v1(55.2,3.9) 55.247,3.947 62.161,3.947 v1(65.655,7.441)
MUX_2: R8.1 U19.11 | length 70.9
  Top Layer w0.246: v1(73.3,44.3) 88.2,44.3 93.2,39.3 93.2,22.4 92.3,21.5 90.6,21.5 88.213,19.113 U19.11@88.213,17.656
  Layer 3 w0.246: v1(52.85,35.275) 60.734,35.275 69.159,43.7 72.7,43.7 v1(73.3,44.3)
MUX_2_P: R74.2 U1.GP12 | length 49.4
  Layer 3 w0.2: U1.GP12@43.267,5.11 43.265,4.161 44.027,3.4 86.6,3.4 88.166,4.966 v1(88.166,7.537)
NetC3_2: C3.2 FB2.2 U2.1 U2.3 | length 8.7
  Top Layer w0.254: U2.3@10.743,66.624 11.601,66.624 11.75,66.773 11.75,68.375 11.601,68.524 U2.1@10.743,68.524
  Top Layer w0.5: FB2.2@5.75,68.524 C3.2@8.089,68.524 U2.1@10.743,68.524
NetC4_2: C4.2 U5.29 | length 5.5
  Top Layer w0.2: C4.2@9.621,85.9 10.521,85 13.675,85 14.088,85.413 14.591,85.413 U5.29@14.601,85.422
NetC5_2: C5.2 CMC1.4 FB1.1 | length 6.1
  Top Layer w0.75: CMC1.4@25.718,50.643 27.994,52.919 C5.2@28.081,52.919 28.081,53.04 29,53.96 FB1.1@29,55.324
NetC7_2: C7.2 J2.S1 J2.S3 R3.1 | length 8.3
  Top Layer w0.5: J2.S3@3.2,43.82 J2.S1@7,43.82 7.056,43.764 11.444,43.764 R3.1@11.5,43.709
NetC9_2: C9.2 FB3.2 U3.1 U3.3 | length 8.8
  Top Layer w0.254: U3.3@29.404,66.303 30.303,66.303 30.5,66.5 30.5,68 30.297,68.203 U3.1@29.404,68.203
  Top Layer w0.5: FB3.2@24.426,68.214 C9.2@26.75,68.214 26.756,68.209 29.398,68.209 U3.1@29.404,68.203
NetC11_2: C11.2 FB4.2 U4.1 U4.3 | length 8.8
  Top Layer w0.254: U4.1@67.708,50.025 67.708,50.908 67.9,51.1 69.4,51.1 69.608,50.892 U4.3@69.608,50.025
  Top Layer w0.5: FB4.2@67.708,45.047 C11.2@67.708,47.371 U4.1@67.708,50.025
NetC13_1: C13.1 U5.19 | length 5.7
  Top Layer w0.2: U5.19@17.801,88.122 17.801,89.422 18.351,89.972 18.351,92.78 C13.1@18.95,93.379
NetC14_1: C14.1 L2.1 U5.12 | length 4.8
  Top Layer w0.246: U5.12@19.501,85.422 20.709,85.422 21.198,84.933 21.433,85.168 21.688,85.168 21.7,85.156 23.623,85.156 23.875,84.904 C14.1@23.875,84.9
NetC15_1: C15.1 L1.1 U5.13 | length 4.2
  Top Layer w0.246: U5.13@19.501,85.922 20.822,85.922 21.092,86.192 21.092,86.208 21.289,86.405 L1.1@21.604,86.405 ; L1.1@21.605,86.411 C15.1@23.464,86.411
NetC15_2: C15.2 R7.2 | length 1.6
  Top Layer w0.246: C15.2@24.74,86.415 R7.2@26.361,86.415
NetC18_1: C18.1 U5.24 | length 2.4
  Top Layer w0.2: C18.1@14.294,90.127 15.301,89.12 U5.24@15.301,88.122
NetC19_2: C19.2 U6.29 | length 5.3
  Top Layer w0.2: C19.2@50.385,37.442 51.06,38.117 51.06,38.738 51.196,38.874 51.196,41.529 50.816,41.909 50.816,42.234 U6.29@50.8,42.25
NetC20_1: C20.1 L4.1 U6.12 | length 5
  Top Layer w0.246: U6.12@50.8,47.15 50.8,48.433 L4.1@51.289,48.922 51.067,49.145 51.067,49.423 51.1,49.457 51.1,51.496 C20.1@51.324,51.719
NetC20_2: C20.2 C84.1 R53.2 | length 9.1
  Top Layer w0.246: C20.2@51.324,52.969 51.5,53.146 51.5,54.416 R53.2@51.783,54.698 51.783,54.831 cw(c54.323,54.831) 52.527,56.627 53.764,57.864 ccw(c52.227,59.4) 54.4,59.4 ccw(c53.424,59.4) 54.114,60.09 C84.1@53.559,60.645
NetC21_1: C21.1 U5.23 | length 3.6
  Top Layer w0.2: C21.1@15.364,91.537 15.364,91.511 15.801,91.074 U5.23@15.801,88.122
NetC28_1: C28.1 L3.1 U6.13 | length 3.9
  Top Layer w0.246: C28.1@49.783,51.108 49.783,49.282 L3.1@49.811,49.254 ; L3.1@49.811,48.939 50.3,48.45 U6.13@50.3,47.15
NetC28_2: C28.2 R12.2 | length 1.6
  Top Layer w0.246: C28.2@49.783,52.358 49.812,52.388 R12.2@49.812,53.994
NetC29_1: C29.1 U6.19 | length 5.7
  Top Layer w0.2: C29.1@42.842,46.432 42.877,46.468 43.372,46.468 43.84,46 46.25,46 46.8,45.45 U6.19@48.1,45.45
NetC30_1: C30.1 U6.24 | length 2.4
  Top Layer w0.2: C30.1@46.096,41.943 47.102,42.95 U6.24@48.1,42.95
NetC31_1: C31.1 U6.23 | length 3.6
  Top Layer w0.2: C31.1@44.685,43.013 44.721,42.978 45.216,42.978 45.688,43.45 U6.23@48.1,43.45
NetC42_1: C42.1 L5.1 U7.3 | length 5
  Top Layer w0.246: L5.1@37.605,89.534 37.992,89.921 37.992,90.317 38.139,90.465 38.139,91.805 ; U7.3@37.608,91.805 38.139,91.805 ; C42.1@39.592,93.184 39.517,93.184 38.139,91.805
NetC45_1: C45.1 L6.1 U8.3 | length 4.6
  Top Layer w0.246: L6.1@36.118,78.931 36.118,79.213 36.505,79.6 37.343,79.6 37.643,79.9 ; C45.1@37.635,78.673 37.643,78.681 37.643,79.9 ; U8.3@37.643,81.202 37.643,79.9
NetC46_2: C46.2 R11.1 | length 2.6
  Top Layer w0.2: R11.1@15.574,77.304 15.964,77.304 16.775,76.493 C46.2@17.806,76.493
NetC47_2: C47.2 R18.1 | length 2.6
  Top Layer w0.2: R18.1@58.919,43.223 58.919,43.569 59.729,44.379 C47.2@59.729,45.455
NetC48_1: C48.1 U9.1 | length 16.2
  Top Layer w0.246: U9.1@57.51,78.685 57.6,78.596 71.889,78.596 C48.1@73.175,79.881
NetC49_1: C49.1 U10.1 | length 16.3
  Top Layer w0.246: U10.1@70.975,92.226 72.726,92.226 72.931,92.431 72.931,97.656 73.075,97.8 77.606,97.8 77.75,97.656 77.75,94.373 77.556,94.179 77.556,94.104 77.304,93.852 C49.1@77.229,93.852
NetC50_2: C50.2 R40.2 U13.3 | length 8.4
  Bottom Layer w0.35: C50.2@74.5,66 74.5,64.3 76.613,62.187 U13.3@77.908,62.187
  Bottom Layer w0.5: C50.2@74.5,66 74.54,66.04 74.54,68.314 R40.2@74.58,68.354
NetC52_2: C52.2 C53.2 U11.1 | length 5.1
  Bottom Layer w0.4: 88.75,26.659 U11.1@88.75,28.03
  Bottom Layer w0.45: 88.75,26.659 89.903,25.506 C52.2@89.903,23.452
NetC54_2: C54.2 R41.2 U13.5 | length 7.8
  Bottom Layer w0.35: C54.2@80.4,66.3 80.4,64.4 81.343,63.457 U13.5@83.308,63.457
  Bottom Layer w0.5: R41.2@77.789,66.352 77.815,66.326 C54.2@80.374,66.326
NetC57_2: C57.2 FB5.2 U12.1 U12.3 | length 8.9
  Top Layer w0.254: U12.3@75.684,32.389 75.684,31.416 75.95,31.15 77.35,31.15 77.584,31.384 U12.1@77.584,32.389
  Top Layer w0.5: U12.1@77.584,32.389 C57.2@77.584,35.192 FB5.2@77.584,37.223
NetC63_2: C63.2 R44.1 | length 2.9
  Bottom Layer w0.3: C63.2@76.391,54.092 77.566,54.092 R44.1@78.818,55.344
NetC64_2: C64.2 R45.1 | length 2.8
  Bottom Layer w0.3: C64.2@78.388,48.645 78.388,48.78 78.913,49.305 R45.1@80.842,49.305
NetC65_2: C65.2 R48.1 | length 2.5
  Bottom Layer w0.3: C65.2@88.963,65.62 88.973,65.61 R48.1@88.973,63.166
NetC66_2: C66.2 R49.1 | length 2.2
  Bottom Layer w0.3: R49.1@93.9,56.139 C66.2@93.9,58.292
NetC67_1: C67.1 R43.1 U14.1 | length 7.5
  Bottom Layer w0.3: R43.1@83.021,49.176 83.021,49.226 83.49,49.695 U14.1@85.8,49.695 85.75,49.695 85.6,49.545 85.6,46.372 85.359,46.131 C67.1@85.359,45.389
NetC67_2: C67.2 R50.1 | length 2.8
  Bottom Layer w0.3: C67.2@87.622,43.126 89,41.748 R50.1@89,40.875
NetC69_1: C69.1 R47.1 U14.7 | length 9.6
  Bottom Layer w0.3: C69.1@91.2,46.079 90.675,46.604 90.141,46.604 89.965,46.78 89.965,50.789 90.141,50.965 93.775,50.965 R47.1@93.895,51.085
NetC69_2: C69.2 R51.1 | length 2
  Bottom Layer w0.3: R51.1@91.2,40.875 C69.2@91.2,42.879
NetC71_1: C71.1 L7.1 U15.3 | length 4.2
  Top Layer w0.264: L7.1@48.571,64.502 48.797,64.729 49.332,64.729 50.435,63.625 C71.1@50.435,63.592 cw(c50.325,63.592) 50.403,63.514 U15.3@49.217,62.327
NetC71_2: C71.2 R25.1 R27.2 | length 3.9
  Top Layer w0.264: C71.2@51.319,64.476 cw(c53.081,62.714) 53.081,65.206 R27.2@53.177,65.206 54.855,65.206 ccw(c54.855,65.385) R25.1@54.981,65.258
NetC72_1: C72.1 T1.3 | length 3.4
  Top Layer w0.246: T1.3@77.25,89.3 77.25,88.544 77.394,88.4 78.275,88.4 79.048,89.173 79.123,89.173 79.375,89.425 C72.1@79.375,89.5
NetC72_2: C72.2 J1.1 | length 11.2
  Top Layer w0.246: C72.2@80.625,89.5 85.8,89.5 87,90.7 J1.1@87,95
NetC74_2: C74.2 FB8.2 U16.1 U16.3 | length 8.9
  Top Layer w0.254: U16.3@66.003,32.463 66.003,31.362 66.152,31.213 67.753,31.213 67.903,31.363 U16.1@67.903,32.463
  Top Layer w0.5: U16.1@67.903,32.463 C74.2@67.903,35.117 FB8.2@67.903,37.148
NetC82_1: C82.1 U7.1 | length 1.9
  Top Layer w0.246: C82.1@32.752,91.795 34.601,91.795 U7.1@34.611,91.805
NetC82_2: C82.2 R21.2 | length 2.6
  Top Layer w0.2: R21.2@29.865,89.717 30.165,90.067 31.227,91.445 C82.2@31.502,91.795
NetC83_1: C83.1 R23.1 | length 2.7
  Top Layer w0.2: R23.1@29.865,83.409 30.165,83.059 31.261,81.65 C83.1@31.536,81.3
NetC83_2: C83.2 U8.1 | length 1.9
  Top Layer w0.246: C83.2@32.786,81.2 34.644,81.2 U8.1@34.646,81.202
NetC84_2: C84.2 U15.1 | length 1.9
  Top Layer w0.246: U15.1@51.336,60.208 ccw(c51.336,60.252) 51.367,60.221 C84.2@52.675,61.529
NetDS1_2: DS1.2 R36.1 | length 2.5
  Top Layer w0.45: R36.1@0.942,51.897 0.942,53.292 1.65,54 DS1.2@1.75,54
NetFB6_2: FB6.2 R35.2 U9.3 | length 4.6
  Top Layer w0.246: FB6.2@46.267,78.174 48.318,78.174 R35.2@48.396,78.096 ; R35.2@48.396,78.196 50.009,79.808 U9.3@50.191,79.808
NetFB7_2: FB7.2 R37.2 U10.3 | length 5
  Top Layer w0.246: U10.3@65.006,87.844 65.6,87.25 65.6,86.434 66.113,85.921 66.113,85.871 66.39,85.594 R37.2@66.44,85.594 FB7.2@66.44,83.465
NetJ2_A5: J2.A5 R1.1 | length 3.3
  Top Layer w0.35: J2.A5@7.08,40 10,40 R1.1@10.25,39.75
NetJ2_B5: J2.B5 R2.1 | length 3.8
  Top Layer w0.35: J2.B5@7.08,39 8,39 9.5,37.5 R2.1@10.271,37.5
NetJ4_1: J4.1 R52.1 | length 4.7
  Top Layer w0.246: R52.1@27.049,82.84 ccw(c29.319,82.84) 27.714,81.235 cw(c25.453,78.973) 28.651,78.973 J4.1@28.651,78.522
NetJ5_1: J5.1 R53.1 | length 4.7
  Top Layer w0.246: R53.1@53.383,54.698 ccw(c53.383,56.969) 54.988,55.363 ; 54.988,55.363 cw(c57.249,53.102) 57.249,56.3 J5.1@57.7,56.3
NetL5_2: L5.2 R20.1 | length 2.2
  Top Layer w0.35: R20.1@35.825,87.355 L5.2@35.825,89.534
NetL6_2: L6.2 R24.1 | length 2.2
  Top Layer w0.35: R24.1@34.338,76.752 L6.2@34.338,78.931
NetL7_2: L7.2 R38.1 | length 2.4
  Top Layer w0.5: R38.1@45.104,66.593 45.427,66.593 cw(c45.427,64.053) 47.224,65.849 L7.2@47.312,65.761
NetR4_1: R4.1 R15.1 Y1.3 | length 3.5
  Top Layer w0.5: R4.1@65.8,64.85 65.8,64.8 66,64.8 66.65,64.15 ; Y1.3@66.65,62.85 66.707,62.907 66.707,64.057 R15.1@67.5,64.85
NetR5_2: R5.2 U5.22 | length 5.7
  Top Layer w0.2: R5.2@15.968,93.661 15.968,93.307 16.3,92.975 U5.22@16.3,88.12
NetR6_2: R6.2 U5.30 | length 5.7
  Top Layer w0.2: R6.2@9.6,83.4 9.65,83.4 10,83.75 10,83.8 10.875,84.675 13.81,84.675 13.811,84.676 14.018,84.676 14.264,84.922 U5.30@14.601,84.922
NetR8_2: R8.2 U6.30 | length 5.5
  Top Layer w0.2: U6.30@51.3,42.25 51.3,41.911 51.572,41.64 51.572,38.73 52.864,37.438 R8.2@52.864,37.388
NetR10_2: R10.2 U11.9 | length 10.8
  Top Layer w0.35: v1(81.8,29) 81.841,29 82.6,29.759 82.6,34.6 83.55,35.55 85.15,35.55 85.371,35.329 85.371,34.729 v1(85.4,34.7)
  Bottom Layer w0.35: v1(85.4,34.7) 85.4,34.659 85.47,34.589 85.47,33.8 U11.9@85.5,33.77
NetR14_2: R14.2 U6.22 | length 5.7
  Top Layer w0.2: R14.2@42.561,43.617 42.894,43.95 U6.22@48.1,43.95
NetR19_2: R19.2 U17.14 | length 3.7
  Top Layer w0.35: R19.2@61.6,21.2 61.6,19.8 61.795,19.605 U17.14@61.795,17.56
NetR21_1: R21.1 R22.2 R23.2 | length 2.9
  Top Layer w0.2: R23.2@29.865,85.109 R22.2@29.865,86.563 R21.1@29.865,88.017
NetR30_2: R30.2 T2.6 | length 1.9
  Top Layer w0.246: T2.6@76.15,82 76.15,80.5 R30.2@76.4,80.25
NetR31_2: R31.2 T1.6 | length 1.8
  Top Layer w0.246: R31.2@75.65,91.8 75.927,91.523 76.006,91.523 76.15,91.379 T1.6@76.15,90.3
NetR32_2: R32.2 U17.13 | length 3.9
  Top Layer w0.35: U17.13@63.065,17.56 63.065,19.565 63.704,20.204 R32.2@63.704,21.201
NetR33_1: R33.1 U17.3 | length 65.3
  Top Layer w0.254: U17.3@61.795,12.64 61.797,12.637 61.797,10.703 v1(61.8,10.7)
  Layer 3 w0.2: v1(10.105,1.315) 10.918,1.315 13.028,3.425 20.725,3.425 21.7,4.4 21.7,8.2 23.5,10 53.8,10 57.55,6.25 61.45,6.25 61.8,6.6 v1(61.8,10.7)
NetR42_1: R42.1 U13.1 U14.3 | length 13
  Bottom Layer w0.2: R42.1@78.648,57.523 78.698,57.523 79.625,56.596 79.625,54.575 81.965,52.235 U14.3@85.8,52.235
  Bottom Layer w0.3: U13.1@77.908,59.647 77.908,58.263 78.298,57.873 78.298,57.823 78.598,57.523 R42.1@78.648,57.523
NetR42_2: R42.2 R44.2 U13.2 | length 7.2
  Bottom Layer w0.3: U13.2@77.908,60.917 77.961,60.864 78.936,60.864 80.448,59.352 R42.2@80.448,57.523 80.448,55.374 R44.2@80.418,55.344
NetR43_2: R43.2 R45.2 U14.2 | length 5
  Bottom Layer w0.3: R45.2@80.842,50.905 82.972,50.905 83.032,50.965 U14.2@85.8,50.965
NetR46_1: R46.1 U13.7 U14.5 | length 15.5
  Bottom Layer w0.3: U13.7@83.308,60.917 83.458,61.067 84.075,61.067 84.109,61.1 85.27,61.1 R46.1@85.494,61.324 87.776,61.324 92.405,56.695 92.405,53.681 92.229,53.505 U14.5@91.2,53.505
NetR46_2: R46.2 R48.2 U13.6 | length 4.5
  Bottom Layer w0.3: U13.6@83.308,62.187 84.606,62.187 85.494,63.074 R46.2@85.494,63.124 87.331,63.124 R48.2@87.373,63.166
NetR47_2: R47.2 R49.2 U14.6 | length 4.6
  Bottom Layer w0.3: U14.6@91.2,52.235 92.435,52.235 93.085,52.885 R47.2@93.895,52.885 93.895,54.533 R49.2@93.9,54.539
NetR54_2: R54.2 U17.12 | length 4.2
  Top Layer w0.35: U17.12@64.335,17.56 64.335,18.865 65.808,20.338 R54.2@65.808,21.186
NetR55_1: R55.1 U17.4 | length 61.8
  Top Layer w0.2: U17.4@63.065,12.64 63.083,12.622 63.083,10.717 v1(63.1,10.7)
  Layer 3 w0.2: v1(14.573,1.315) 15.758,2.5 23.6,2.5 24.3,3.2 24.3,7.4 25.8,8.9 53.5,8.9 56.7,5.7 62,5.7 63.1,6.8 v1(63.1,10.7)
NetR57_1: R57.1 U17.5 | length 57.7
  Top Layer w0.2: U17.5@64.335,12.64 64.367,12.607 v1(64.367,10.733)
  Layer 3 w0.2: v1(18.7,1.3) 24.6,1.3 26.8,3.5 26.8,6.5 28.1,7.8 52.9,7.8 55.6,5.1 62.5,5.1 64.367,6.967 v1(64.367,10.733)
NetR58_1: R58.1 U17.6 | length 2.8
  Top Layer w0.35: U17.6@65.605,12.64 65.63,12.615 65.63,9.866 R58.1@65.655,9.841
NetR59_2: R59.2 U18.14 | length 2.9
  Top Layer w0.35: U18.14@73.099,17.624 73.101,17.627 73.101,20.562 R59.2@73.104,20.564
NetR60_2: R60.2 U18.13 | length 3.3
  Top Layer w0.35: U18.13@74.369,17.624 74.4,17.655 74.4,19.36 74.933,19.893 74.933,20.289 R60.2@75.208,20.564
NetR61_1: R61.1 U18.3 | length 56.5
  Top Layer w0.2: R61.1@40.7,26.7 40.75,26.7 41.85,27.8 49.1,27.8 49.8,27.1 55.1,27.1 57.2,25 57.2,8.6 59.6,6.2 70.7,6.2 73.099,8.599 U18.3@73.099,12.704
NetR62_2: R62.2 U18.12 | length 3.7
  Top Layer w0.35: U18.12@75.639,17.624 75.639,18.899 76.979,20.239 77.037,20.239 77.312,20.514 R62.2@77.312,20.564
NetR63_1: R63.1 U18.4 | length 54.2
  Top Layer w0.2: R63.1@44.3,26.7 44.35,26.7 44.7,27.05 44.7,27.059 45.001,27.36 48.387,27.36 49.447,26.3 54,26.3 56.4,23.9 56.4,8.2 59.3,5.3 71.2,5.3 74.369,8.469 U18.4@74.369,12.704
NetR65_1: R65.1 U18.5 | length 51.8
  Top Layer w0.2: R65.1@47.794,26.685 49.379,25.1 53.5,25.1 55.7,22.9 55.7,7.9 59,4.6 72,4.6 75.639,8.239 U18.5@75.639,12.704
NetR66_1: R66.1 U18.6 | length 2.8
  Top Layer w0.35: U18.6@76.909,12.704 76.914,12.699 76.914,9.911 R66.1@76.919,9.905
NetR67_2: R67.2 U19.14 | length 3.5
  Top Layer w0.35: U19.14@84.403,17.656 84.403,20.991 R67.2@84.508,21.096
NetR68_2: R68.2 U19.13 | length 3.8
  Top Layer w0.35: U19.13@85.673,17.656 85.673,20.157 86.287,20.771 86.337,20.771 86.588,21.022 R68.2@86.588,21.072
NetR69_1: R69.1 U19.3 | length 65.6
  Top Layer w0.2: R69.1@34.941,1.315 35.815,1.315 36.9,2.4 36.9,6.289 37.711,7.1 43.9,7.1 44.523,6.477 44.523,4.054 45.777,2.8 81.6,2.8 84.403,5.603 U19.3@84.403,12.736
NetR70_2: R70.2 U19.12 | length 4.2
  Top Layer w0.35: U19.12@86.943,17.656 86.943,19.273 88.716,21.046 R70.2@88.716,21.096
NetR71_1: R71.1 U19.4 | length 63.2
  Top Layer w0.2: R71.1@39.669,1.315 39.4,1.583 39.4,5.9 39.9,6.4 41.683,6.4 42.1,5.983 42.1,3.4 43.5,2 82.2,2 85.673,5.473 U19.4@85.673,12.736
NetR73_1: R73.1 U19.5 | length 52.1
  Top Layer w0.2: R73.1@43.934,1.315 83.015,1.315 86.943,5.243 U19.5@86.943,12.736
NetR74_1: R74.1 U19.6 | length 2.8
  Top Layer w0.35: R74.1@88.166,9.937 88.19,9.961 88.19,12.713 U19.6@88.213,12.736
NetT1_1: T1.1 T2.1 | length 6.3
  Top Layer w0.246: T2.1@76.15,83 T1.1@76.15,89.3
PICO_GND: C79.1 C80.1 C81.1 U1.AGND U1.GND U1.GND2 U1.GND3 U1.GND4 U1.GND5 U1.GND6 U1.GND7 U17.2 U17.8 U18.2 U18.8 U19.2 U19.8
  other v1: 90,2.5 77.5,5 95,7.5 58.8,7.8 59.8,7.8 70.1,7.9 71.1,7.9 81.4,7.9 82.4,7.9 67.5,10 68.1,11.7 71.8,11.7 79.5,11.7 90.8,11.7 83.2,11.8 60.5,11.9 27.5,27.5 7.5,30 12.5,30 17.5,30 22.5,30
REF_1: C4.1 R15.2 | length 77.2
  Top Layer w0.2: v1(7.7,72.4) 17.8,72.4 19.2,71 65.2,71 67.5,68.7 R15.2@67.5,66.55
  Layer 3 w0.2: v1(7.1,85.9) 7.4,85.6 7.4,72.7 v1(7.7,72.4)
REF_2: C19.1 R4.2 | length 42.5
  Top Layer w0.2: v1(63.75,41.95) 63.75,42.028 64.1,42.378 64.1,65.4 65.217,66.517 65.767,66.517 R4.2@65.8,66.55
  Layer 3 w0.2: v1(50.35,34.8) 50.35,35.45 51.11,36.21 58.01,36.21 v1(63.75,41.95)
REFL_IF: C54.1 FB7.1 | length 36.3
  Top Layer w0.2: FB7.1@67.593,83.465 67.628,83.5 v4(68.7,83.5)
  Bottom Layer w0.2: v4(68.7,83.5) 68.7,83.634 72.009,86.943 80.307,86.943 84.8,82.45 84.8,72.3 82,69.5 C54.1@80.4,69.5
Reflected_Signal: C49.2 T1.4 | length 2.3
  Top Layer w0.246: C49.2@77.229,92.602 77.229,90.321 T1.4@77.25,90.3
SCKI: R62.1 U11.6 | length 11.1
  Top Layer w0.2: R62.1@77.312,22.364 80.764,22.364 85.269,26.869 v1(85.269,26.901)
  Bottom Layer w0.2: v1(85.269,26.901) 85.269,26.982 85.395,27.108 85.395,27.925 U11.6@85.5,28.03
SCKI_P: R65.2 U1.GP21 | length 12
  Top Layer w0.35: U1.GP21@38.187,22.89 39.241,21.836 44.145,21.836 44.6,22.291 44.6,25.292 R65.2@45.994,26.685
Stimulus_OUT: R25.2 R26.2 T2.3 | length 29.2
  Top Layer w0.264: R25.2@56.681,65.258 56.839,65.1 58.266,65.1 R26.2@58.492,65.326 58.754,65.064 59.964,65.064 v1(60.5,65.6) ; v1(73.5,83) 74.058,83.558 cw(c74.244,83.371) 74.086,83.582 cw(c74.244,83.371) 74.244,83.635 74.762,83.635 cw(c74.762,83.371) 75.023,83.41 75.067,83.118 T2.3@75.05,83
  Layer 3 w0.276: v1(60.5,65.6) 71.006,76.106 ccw(c69.21,77.902) 71.75,77.902 71.75,80.448 cw(c73.686,80.448) 72.317,81.817 v1(73.5,83)
USB_GND: C7.1 CMC1.1 D2.1 J2.A12 J2.B12 J3.3 R1.2 R2.2 R3.2 | length 60
  Top Layer w0.5: v3(8.5,49.875) 8.5,48.5 9.25,47.75 16,47.75 23.239,40.511 CMC1.1@23.239,38.4 ; R2.2@11.729,37.549 R1.2@11.729,40 11.729,42.068 11.548,42.25 R3.2@11.5,42.25 C7.1@9.5,42.25 J2.B12@7.08,42.25 5.5,42.25 4.75,41.5 4.75,37.5 5.5,36.75 J2.A12@7.08,36.75 7.23,36.6 7.943,36.6 9.793,34.75 17.056,34.75 D2.1@18.278,35.972 19.806,37.5 21.562,37.5 22.461,38.4 CMC1.1@23.239,38.4 ; CMC1.1@24.282,37.357 CMC1.1@23.239,38.4
V_REF: C60.2 R34.1 R39.2 R40.1 R41.1 | length 20.8
  Bottom Layer w0.35: R39.2@72,58.146 72,58.6 ; C60.2@74.604,58.536 72.064,58.536 72,58.6 ; R41.1@77.789,68.052 77.789,68.102 75.836,70.054 R40.1@74.58,70.054 73.205,70.054 73,69.849 73,60.18 72.795,59.975 72.225,59.975 72,59.75 R34.1@72,59.7 72,58.6
VINL: C68.1 R50.2 U11.13 | length 6.9
  Bottom Layer w0.3: U11.13@88.1,33.77 88.1,34.996 87.646,35.451 87.646,36.086 C68.1@87.632,36.1 87.688,36.156 88.356,36.156 89,36.8 R50.2@89,39.525
VINR: C70.1 R51.2 U11.14 | length 8.7
  Bottom Layer w0.3: U11.14@88.75,33.77 88.75,34.95 89.853,36.053 C70.1@90.989,36.053 91.753,36.053 92.2,36.5 92.2,37.9 91.199,38.901 R51.2@91.199,39.524
VTUNE_1: C17.2 R28.2 U5.20 | length 47.5
  Top Layer w0.2: R28.2@12.991,77.322 13.091,77.322 C17.2@14.174,76.24 ; R28.2@12.991,77.42 11.043,75.472 7.151,75.472 5.251,77.372 5.251,91.872 10.551,97.172 15.151,97.172 17.315,95.008 17.315,88.809 17.301,88.795 U5.20@17.301,88.122
VTUNE_2: C33.2 R29.2 U6.20 | length 47.5
  Top Layer w0.2: U6.20@48.1,44.95 48.09,44.96 47.519,44.96 47.5,44.979 41.229,44.979 39.05,42.8 39.05,38.2 44.35,32.9 58.85,32.9 60.75,34.8 60.75,38.672 R29.2@58.9,40.522 58.9,40.741 C33.2@59.982,41.823
pads on no net: J2.S2 J2.S4 U1.3V3_EN U1.ADC_VREF U1.GP0 U1.GP5 U1.GP6 U1.GP7 U1.GP8 U1.GP13 U1.GP14 U1.GP15 U1.GP16 U1.GP17 U1.GP18 U1.GP26_A0 U1.GP27_A1 U1.GP28_A2 U1.RUN U1.VBUS U1.VSYS U2.4 U3.4 U4.4 U5.5 U5.14 U5.15 U5.25 U6.5 U6.14 U6.15 U6.25 U12.4 U16.4

## Polygon pours and split planes (outlines as drawn)
GND on Layer 3 "NONET_L-01_P-001" (solid, pour order 19): 0,100 35,100 35,71 54.981,71 54.981,60 67,60 67,65.7 83.3,82 100,82 100,60 100,16 59,16 58,17 58,26 56,28 31,28 28,31 28,35 28,38 14,52 0,52
PICO_GND on Layer 3 "NONET_L-01_P-001" (solid, pour order 18): 0,32 25,32 26,31 30.72,26.28 54.72,26.28 56,25 56,16 58,14 100,14 100,0 0,0
3V3_Synth_2 on Layer 3 "NONET_L-01_P-001" (solid, pour order 2): 31.299,67.75 35.028,67.75 35.4,67.378 35.4,62.6 42.2,55.8 46.35,51.65 46.35,43.3 49,40.65 53.5,40.65 54.85,39.3 56.2,40.65 54.85,42 54.85,47.38 56.2,48.85 53.975,51.075 51.9,49 51.15,49 51.15,47.5 49.85,47.5 49.35,48 49.35,50.65 36.8,63.2 36.8,68 35.8,69 31.299,69
3V3_Synth_1 on Layer 3 "NONET_L-01_P-001" (solid, pour order 8): 24.051,88.7 24.051,89.922 15.701,89.922 13.051,87.272 13.051,82.772 11.701,81.422 12.7,80.423 12.7,70.028 14.093,70.028 14.093,79.793 14.808,80.508 20.773,80.508 21.249,80.071 23.476,82.297 21.401,84.372 21.401,85.122 19.901,85.122 19.901,86.422 20.401,86.922 24.051,87.022
3V3_Digital on Layer 3 "NONET_L-01_P-001" (solid, pour order 0): 58.9,18.1 59,18.2 89.8,18.2 89.8,18.8 89.1,19.5 68.6,19.5 68.6,26.8 67.3,26.8 67.3,19.5 59.8,19.5 58.9,18.6
5V_CLN on Layer 3 "NONET_L-01_P-001" (solid, pour order 10): 29.8,57 9.7,57 6.7,54 6.7,51.8 4.7,51.8 4.6,51.9 4.6,54.2 8.7,58.3 22.3,58.3 22.3,58.7 23.1,59.5 23,59.6 23,60.2 8.3,60.2 4.7,63.8 4.7,66.9 6.6,66.9 6.6,64.2 9.317,61.483 23.067,61.483 23.067,63.533 21.297,65.303 21.297,69.497 21.3,69.5 22.6,69.5 22.6,65.8 24.2,64.2 27,64.2 27,67.7 31,71.7 31.4,72.666 31.4,86.659 31.641,86.9 32.5,86.9 32.5,71.8 33,71.3 41.6,71.3 42.3,70.6 42.3,69.15 40.75,70.7 32.55,70.7 29.8,67.95
GND on Top Layer "NONET_L-01_P-001" (solid, pour order 12): 0,100 100,100 100,16 59,16 58,17 58,26 56,28 31,28 28,31 28,35 28,38 14,52 0,52
PICO_GND on Top Layer "NONET_L-01_P-001" (solid, pour order 13): 0,32 25,32 26,31 30.72,26.28 54.72,26.28 56,25 56,16 58,14 100,14 100,0 0,0
GND on Layer 2 "NONET_L-01_P-001" (solid, pour order 14): 0,100 100,100 100,16 59,16 58,17 58,26 56,28 31,28 28,31 28,35 28,38 14,52 0,52
PICO_GND on Layer 2 "NONET_L-01_P-001" (solid, pour order 15): 0,32 25,32 26,31 30.72,26.28 54.72,26.28 56,25 56,16 58,14 100,14 100,0 0,0
GND on Bottom Layer "NONET_L-01_P-001" (solid, pour order 16): 0,100 100,100 100,16 59,16 58,17 58,26 56,28 31,28 28,31 28,35 28,38 14,52 0,52
PICO_GND on Bottom Layer "NONET_L-01_P-001" (solid, pour order 17): 0,32 25,32 26,31 30.72,26.28 54.72,26.28 56,25 56,16 58,14 100,14 100,0 0,0

## Keep-outs
Keep-Out Layer:
  circle w0.1: c37.635,75.248 r0.375
  circle w0.1: c39.6,96.6 r0.375
  circle w0.1: c47.4,88.8 r0.375
  circle w0.1: c56.7,92.3 r0.375
  circle w0.1: c73.5,83 r0.375
  circle w0.1: c60.5,65.6 r0.375

## Silkscreen, mask and mechanical layers (free items; w line width, h text height)
Top Overlay:
  text "Designed by  / Ebubekir Tasci /     TA7EBT" at 97,67 h1.2 r90
Mechanical 1:
  circle w0.254: c3,30 r1.65
  circle w0.254: c97,3 r1.65
  circle w0.254: c97,85 r1.65